# Altium PCB ESL.PcbDoc
Units mm, origin at the board's own origin, x right, y up, seen from the top; angles counter-clockwise.
Board outline 59.36 x 30.02 mm, 2 copper layers (Top Layer, Bottom Layer), stack 1.571 mm thick; 26 components, 27 nets, 138 pads, 86 vias.
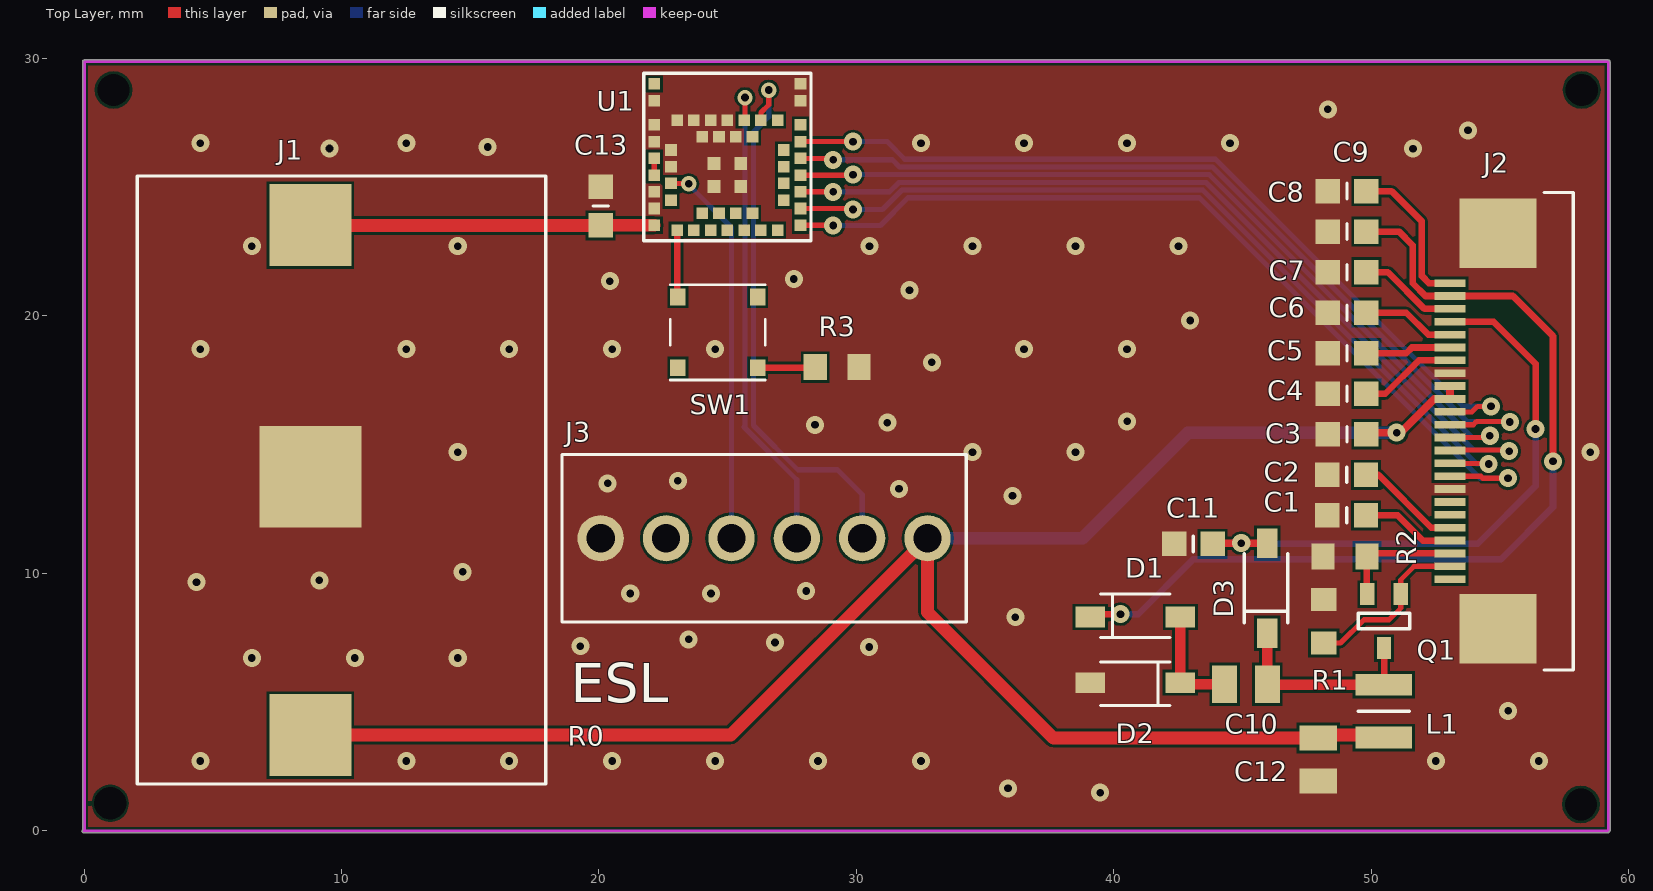
[diagram p0: Top Layer view]
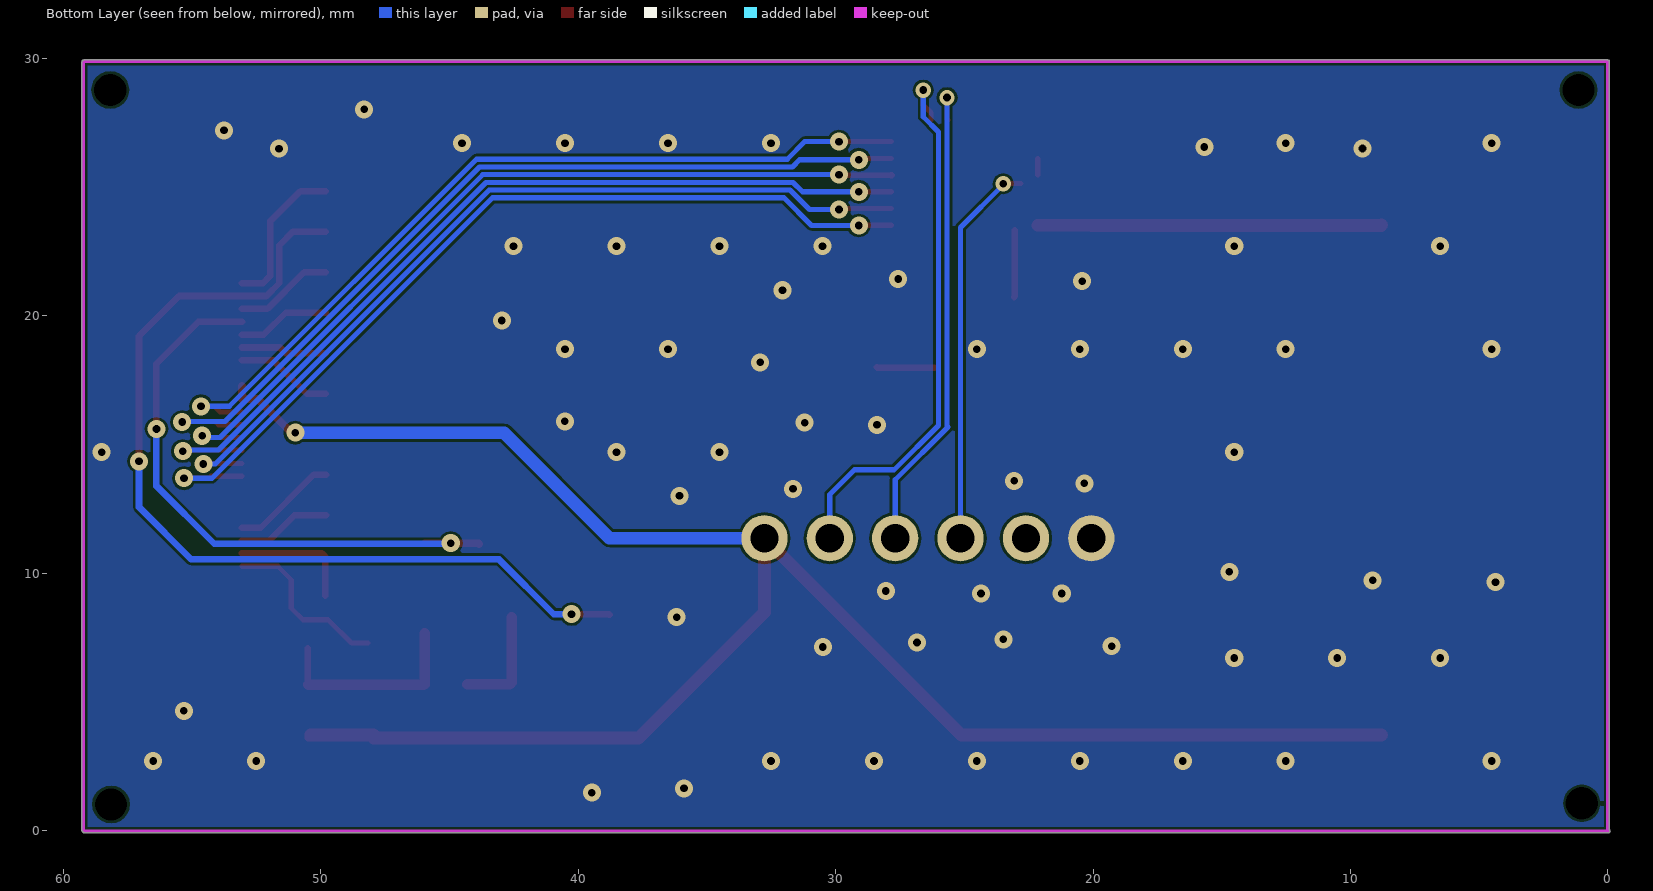
[diagram p1: Bottom Layer view, seen from below]
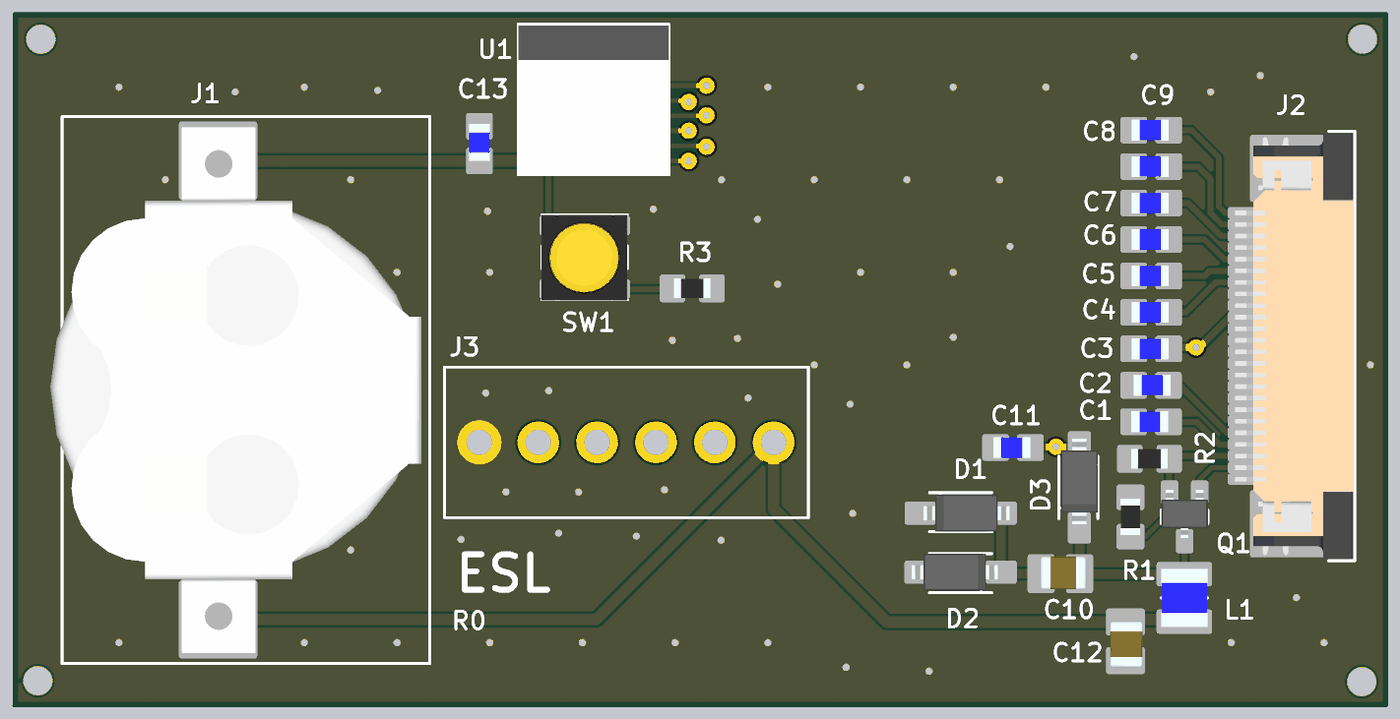
[diagram p2: 3D render of the assembled board from above, using the file's embedded part models]

## Layer stack, top to bottom
Top Solder: solder mask 0.0102, Solder Resist, Dk 3.5
Top Layer: signal copper 0.0356
Dielectric 1: dielectric 1.5, FR-4, Dk 4.8
Bottom Layer: signal copper 0.0356
Bottom Solder: solder mask 0.0102, Solder Resist, Dk 3.5

## Board outline
-0.022,-0.088 cw(c-0.022,-0.025) -0.063,0.023 -0.063,29.87 cw(c0,29.87) 0,29.933 59.214,29.933 cw(c59.214,29.87) 59.277,29.87 59.277,0 cw(c59.214,0) 59.244,-0.055 cw(c59.189,-0.025) 59.189,-0.088

## Design rules (kind name [scope] priority, off if disabled: settings)
BoardOutlineClearance [All] p1: gap=0.1 ignorepadtopadclearanceinfootprint=FALSE except(0.25: Arc-OutlineEdge Arc-CutoutEdge)
Clearance [All] p1: gap=0.1 ignorepadtopadclearanceinfootprint=TRUE
HoleSize [All] p1: absolutevalues=TRUE maxlimit=5 minlimit=0.025 maxpercent=80.000 minpercent=20.000
MinimumAnnularRing [All] p1: minimumring=0.125
MinimumSolderMaskSliver [All] p1: minsoldermaskwidth=0.1
PasteMaskExpansion [All] p1: expansion=0.1
PlaneConnect [All] p1: planeconnectstyle=Direct reliefexpansion=0.508 reliefentries=4 reliefconductorwidth=0.254 reliefairgap=0.254
PolygonConnect [All] p1: connectstyle=Direct reliefconductorwidth=0.254 reliefentries=4 polygonreliefangle="90 Angle" airgapwidth=0.254
RoutingVias [All] p1: holewidth=0.3 width=0.7 viastyle="Through Hole" minholewidth=0.3 minwidth=0.6 maxholewidth=0.3 maxwidth=0.7
SilkToSilkClearance [All] p1: silktosilkclearance=0.1
SilkToSolderMaskClearance [IsPad] p1: minsilkscreentomaskgap=0.1 clearancetoexposedcopper=TRUE
SolderMaskExpansion [All] p1: expansion=0.1 istentingtop=FALSE soldermaskfromhole=TRUE
Width [All] p1: maxlimit=0.5 minlimit=0.2 preferedwidth=0.2
24 further rules are at their usual default settings.

## Components (designator, comment, footprint, x,y, rotation, side; value= is the part's Value field where it differs from the comment)
C1 "Capacitor" CAPC1608N 49.047,12.243 r0 top
C2 "Capacitor" CAPC1608N 49.047,13.818 r180 top
C3 "Capacitor" CAPC1608N 49.059,15.392 r0 top
C4 "Capacitor" CAPC1608N 49.059,16.967 r0 top
C5 "Capacitor" CAPC1608N 49.059,18.542 r0 top
C6 "Capacitor" CAPC1608N 49.059,20.117 r0 top
C7 "Capacitor" CAPC1608N 49.059,21.692 r0 top
C8 "Capacitor" CAPC1608N 49.059,23.266 r0 top
C9 "Capacitor" CAPC1608N 49.059,24.841 r0 top
C10 "Capacitor" CAPC2012N 45.136,5.682 r180 top
C11 "Capacitor" CAPC1608N 43.091,11.132 r0 top
C12 "Capacitor" CAPC2012N 47.945,2.761 r90 top
C13 "Capacitor" CAPC1608N 20.066,24.257 r270 top
D1 "MBR0530T1G" DO-SOD-123 40.837,8.295 r0 top
D2 "MBR0530T1G" DO-SOD-123 40.831,5.747 r180 top
D3 "MBR0530T1G" DO-SOD-123 45.957,9.41 r90 top
J1 "Battery_Holder" Battery_Holder 8.788,13.614 r90 top
J2 "WR-FPC" WR-FPC-68712414022 53.061,9.764 r90 top locked
J3 "282834-6" 282834-6 26.415,11.354 r180 top
L1 "1239AS-H-100M=P2" IND_2520 50.488,3.611 r90 top
Q1 "SI1308EDL-T1-GE3" MOS-SOT-323-3 51.148,9.187 r270 top
R1 "Resistor" RESC1608N 48.161,8.129 r270 top
R2 "Resistor" RESC1608N 48.983,10.643 r0 top
R3 "Resistor" RESC1608N 29.253,18.004 r180 top
SW1 "TL3312NF160Q" SPST-TL3312NF160Q 23.062,20.726 r0 top
U1 "ANNA-B112-01B" ANNA-B112-01B 22.148,29.004 r0 top

## Footprints (in the part's own frame and the unit in brackets; to place one, negate y for a bottom-side part, rotate by r counter-clockwise, add the part's x,y. Pads: shape width x height; smd on the part's side, far side on the other; paste and mask are expansions set on the pad)
282834-6 [mm]
  round 1.8 hole 1.1 mask+0.05: 1(-6.35,0) 2(-3.81,0) 3(-1.27,0) 4(1.27,0) 5(3.81,0) 6(6.35,0)
  silkscreen extent -7.85,-3.25 7.85,3.25
ANNA-B112-01B [mm]
  rect 0.45x0.45 smd: 1(0,0) 2(0,-0.65) 3(0,-1.592) 4(0,-2.242) 5(0,-2.892) 6(0,-3.542) 7(0,-4.192) 8(0,-4.842) 9(0,-5.492) 10(0.65,-2.567) 11(0.65,-3.217) 12(0.65,-3.867) 13(0.65,-4.517) 14(0.89,-5.68) 15(1.54,-5.68) 16(2.19,-5.68) 17(2.84,-5.68) 18(3.49,-5.68) 19(4.14,-5.68) 20(4.79,-5.68) 21(1.865,-5.03) 22(2.515,-5.03) 23(3.165,-5.03) 24(3.815,-5.03) 25(5.68,-5.492) 26(5.68,-4.842) 27(5.68,-4.192) 28(5.68,-3.542) 29(5.68,-2.892) 30(5.68,-2.242) 31(5.68,-1.592) 32(5.68,-0.65) 33(5.68,0) 34(5.03,-4.517) 35(5.03,-3.867) 36(5.03,-3.217) 37(5.03,-2.567) 38(4.79,-1.405) 39(4.14,-1.405) 40(3.49,-1.405) 41(2.84,-1.405) 42(2.19,-1.405) 43(1.54,-1.405) 44(0.89,-1.405) 45(3.815,-2.055) 46(3.165,-2.055) 47(2.515,-2.055) 48(1.865,-2.055)
  rect 0.5x0.5 smd: 49(2.32,-3.092) 50(2.32,-3.992) 51(3.36,-3.092) 52(3.36,-3.992)
  silkscreen extent -0.41,-6.09 6.09,0.41, body extent -0.41,-6.14 6.09,0.36, height 1.25
Battery_Holder [mm]
  rect 3.18x3.18 smd: +(-9.906,0) +(9.906,0)
  rect 3.96x3.96 smd: -(0.127,0)
  silkscreen extent -11.81,-9.14 11.81,6.73, body extent -11.35,-8.76 11.35,7.24, height 3.95
CAPC1608N [mm]
  rrect0% 0.95x0.95 smd: 1(-0.75,0) 2(0.75,0)
  silkscreen extent 0,-0.3 0,0.3, body extent -0.85,-0.45 0.75,0.45, height 0.81
CAPC2012N [mm]
  rect 0.97x1.47 smd: 1(-0.83,0) 2(0.83,0)
  body extent -1.13,-0.76 0.87,0.69, height 1.18
DO-SOD-123 [mm]
  rect 1.15x0.8 smd: 1(-1.75,0) 2(1.75,0)
  silkscreen extent -1.35,-0.8 1.35,0.89, body extent -1.6,-0.8 2.11,0.8, height 1.35
IND_2520 [mm]
  rect 0.85x2.2 smd: 1(0,0) 2(2.05,0)
  silkscreen extent 1.02,-1 1.02,1, body extent -0.22,-1 2.28,1, height 1.2
MOS-SOT-323-3 [mm]
  rect 0.85x0.55 smd: 1(0,0) 2(0,-1.3) 3(2.1,-0.65)
  silkscreen extent 0.75,-1.65 1.35,0.35, body extent -0.13,-1.65 1.97,0.35, height 1.1
RESC1608N [mm] "Chip Resistor, Body 1.6x0.8mm, IPC Medium Density"
  rect 0.9x1 smd: 1(-0.85,0) 2(0.85,0)
  body extent -0.79,-0.42 0.79,0.43, height 0.5
SPST-TL3312NF160Q [mm]
  rect 0.6x0.65 smd: 1(0,0) 2(3.1,0) 3(0,-2.75) 4(3.1,-2.75)
  silkscreen extent -0.3,-3.22 3.4,0.47, body extent -0.33,-3.25 3.37,0.45, height 0.81
WR-FPC-68712414022 [mm] "ZIF Connectors, Horizontal, Top Contact, pitch 0.5mm, 24p"
  rect 0.3x1.2 smd: 1(0,0) 2(0.5,0) 3(1,0) 4(1.5,0) 5(2,0) 6(2.5,0) 7(3,0) 8(3.5,0) 9(4,0) 10(4.5,0) 11(5,0) 12(5.5,0) 13(6,0) 14(6.5,0) 15(7,0) 16(7.5,0) 17(8,0) 18(8.5,0) 19(9,0) 20(9.5,0) 21(10,0) 22(10.5,0) 23(11,0) 24(11.5,0)
  rect 2.7x3 smd: MP1(-1.93,-1.86) MP2(13.43,-1.86)
  silkscreen extent -3.53,-4.78 15.02,-3.66, body extent -3.45,-4.71 14.95,0.39, height 2.1

## Part data
C1 C2 C3 C4 C5 C6 C7 C8 C9 C11 C13: library part CAP-000000001, Value 1=1uF, Value 2=50V, DES="Multilayer Ceramic Capacitors MLCC - SMD/SMT 1uF 50V X5R +/-10% 0603 Gen Purp", FTP=0603, MAN="Taiyo Yuden", MANREF=UMK107BJ105KA-T, NOTE=_, Part Number=CAP-000000001, SUP=Mouser, SUPREF=963-UMK107BJ105KA-T, TOL=10%
C10 C12: library part CAP-000000002, Value 1=4.7uF, Value 2=50V, DES="Multilayer Ceramic Capacitors MLCC - SMD/SMT", FTP=0805, MAN="Murata Electronics", MANREF=GRM21BZ71H475KE15K, NOTE=_, Part Number=CAP-000000002, SUP=Mouser, SUPREF=81-GRM21BZ71H475KE5K, TOL=10%
D1 D2 D3: library part DIR-000000001, "Diode", Value 1="500 mA", Value 2="30 V", DES="Schottky Diodes & Rectifiers 0.5A 30V", FTP=SOD-123, MAN="ON Semiconductor", MANREF=MBR0530T1G, NOTE=_, Part Number=DIR-000000001, SUP=Mouser, SUPREF=863-MBR0530T1G, TOL=_
J1: library part CON-000000002, Value 1=_, Value 2="16 mm", DES="Coin Cell Battery Holders 3012 matte Tin Coin Coin Cell Retainer", FTP=SMD/SMT, MAN="Keystone Electronics", MANREF=3092, NOTE=_, Part Number=CON-000000002, SUP=Mouser, SUPREF=534-3092, TOL=_
J2: library part CON-000000001, Value 1=24pts, Value 2=_, ComponentLink1Description=Manufacturer, ComponentLink1URL=http://www.we-online.de, ComponentLink2Description=Datasheet, ComponentLink2URL=https://katalog.we-online.com/em/datasheet/68712414022.pdf, DES="FFC & FPC Connectors WR-FPC 0.5mm SMT ZIF 24Pin Hrztl Top Cont", FTP=SMD/SMT, MAN="Wurth Elektronik", MANREF=68712414022, NOTE=_, Part Number=CON-000000001, SUP=Mouser, SUPREF=710-68712414022, TOL=_
J3: library part CON-000000003, "Header, 6-Pin", Value 1=6pts, Value 2=2.54mm, DES="282834-6 -  Bornier fil-à-carte, 2.54 mm, 6 Voies, 30 AWG, 16 AWG, 1.4 mm², Par vis", FTP=THT, MAN="BUCHANAN - TE CONNECTIVITY", MANREF=282834-6, NOTE=_, Part Number=CON-000000003, SUP=Farnell, SUPREF=2396255, TOL=_
L1: library part IND-000000001, "Inductor", Value 1="10 uH", Value 2="1 A", DES="Fixed Inductors 10.0uH 460mOhms1.0A +/-20% 2.5x2.0x1.2mm", FTP=2520, MAN="Murata Electronics", MANREF=1239AS-H-100M=P2, NOTE=_, Part Number=IND-000000001, SUP=Mouser, SUPREF=81-1239AS-H-100MP2, TOL="20 %"
Q1: library part TRM-000000001, Value 1="1.5 A", Value 2="30 V", DES="MOSFET 30V Vds 12V Vgs SC70-3", FTP=SOT-323-3, MAN="Vishay Semiconductors", MANREF=SI1308EDL-T1-GE3, NOTE=_, Part Number=TRM-000000001, SUP=Mouser, SUPREF=78-SI1308EDL-T1-GE3, TOL=_
R1 R3: library part RES-000000002, Value 1=10K, Value 2=0.1W, DES="YAGEO (PHYCOMP)  RC0603FR-0710KL  RESISTANCE COUCHE EPAISSE 10K 0.1W 1%", FTP=0603, MAN=YAGEO, MANREF=RC0603FR-0710KL, NOTE=_, Part Number=RES-000000002, SUP=Farnell, SUPREF=9238603, TOL=1%
R2: library part RES-000000001, Value 1=0.47R, Value 2=0.1W, DES="CRL0603-FW-R470ELF -  Résistance à puce CMS, Couche épaisse, 0603 [1608 Metric], 0.47 ohm, Série CRL, Couche épaisse", FTP=0603, MAN=BOURNS, MANREF=CRL0603-FW-R470ELF, NOTE=_, Part Number=RES-000000001, SUP=Farnell, SUPREF=2328098, TOL=1%
SW1: library part SWC-000000001, Value 1=_, DES="Tactile Switches 50mA 12VDC .25mm H 160gf SPST 3.7x3.7mm", FTP=_, MAN=E-Switch, MANREF=TL3312NF160Q, NOTE=_, Part Number=SWC-000000001, SUP=Mouser, SUPREF=612-TL3312NF160Q, TOL=_, Value 2=_
U1: library part RFC-000000001, Package="SMD-52 U-Blox America", Value 1=_, Availability=Unavailable, DES="Bluetooth Bluetooth v5.0 Transceiver Module 2.4GHz Integrated, Chip Surface Mount", FTP=_, MAN=U-Blox, MANREF=ANNA-B112-01B, MF="U-Blox America", MP=ANNA-B112, NOTE=_, Part Number=RFC-000000001, Price=None, SnapEDA_Link=https://www.snapeda.com/parts/ANNA-B112/U-Blox%20America%20Inc./view-part/3115089/?ref=snap, SUP=Digi-Key, SUPREF=672-ANNA-B112-01BTR-ND, TOL=_, Value 2=_

## Free pads (board coordinates)
  round 0 hole 1.25: MT(1.011,1.056) MT(1.139,28.768) MT(58.145,1.016) MT(58.178,28.772)

## Via types
v1: diameter 0.7, hole 0.3, Top Layer to Bottom Layer, tented both sides, 66 vias
v2: diameter 0.7, hole 0.3, Top Layer to Bottom Layer, 17 vias
v3: diameter 0.6, hole 0.3, Top Layer to Bottom Layer, 3 vias

## Nets (pads, with @x,y where several pads share a name; then routed paths per layer and width w, separated by ;. In a path a pad name is that pad's centre, name@x,y a point inside that pad or via, vN(x,y) a via of type N, cw(c..) or ccw(c..) an arc to the next point about the centre after c; other vN are vias at no path point)
3V: C3.2 C12.2 C13.2 J1.+ J2.15 J2.16 J3.1 L1.1 U1.9 | length 87.4
  Top Layer w0.3: C3.2 49.87,15.453 v2(50.989,15.453) 51.137,15.453 52.448,16.764 J2.15 J2.16 ; L1.1@50.391,3.708 L1.1
  Top Layer w0.5: J1.+@8.788,3.708 25.12,3.708 J3.1 32.765,8.477 37.651,3.591 C12.2 ; J1.+@8.788,23.52 8.802,23.507 C13.2 20.071,23.512 U1.9 ; C12.2@47.945,3.708 L1.1@50.391,3.708
  Bottom Layer w0.5: J3.1 38.783,11.354 42.882,15.453 v2(50.989,15.453)
BUSY: J2.9 U1.25 | length 34.8
  Top Layer w0.2: U1.25 v2@29.041,23.512 ; J2.9 54.254,13.764 54.334,13.685 v2(55.314,13.685) v2@55.36,13.731
  Top Layer w0.254: v2@29.041,23.512 29.044,23.512 v2@29.049,23.507
  Bottom Layer w0.2: v2(29.1,23.507) 30.933,23.507 32.005,24.579 43.333,24.579 54.227,13.685 v2(55.314,13.685) v2@55.36,13.731
CS: J2.12 U1.28 | length 35.9
  Top Layer w0.2: J2.12 54.254,15.264 ; U1.28@27.836,25.455 v2@29.87,25.455 ; U1.28@27.836,25.455 v2@29.87,25.455 ; U1.28@27.836,25.455 v2@29.87,25.455
  Top Layer w0.254: U1.28 U1.28@27.836,25.455
  Bottom Layer w0.2: v2(29.869,25.479) 43.706,25.479 53.921,15.264 54.254,15.264
  other v2: 54.607,15.336
D/C: J2.11 U1.27 | length 34.3
  Top Layer w0.2: U1.27 v2@29.054,24.812 ; J2.11 53.081,14.785 55.314,14.785 v2(55.36,14.738)
  Bottom Layer w0.2: v2(29.1,24.813) 31.284,24.813 31.65,25.179 43.582,25.179 53.976,14.785 54.334,14.785 ; 54.335,14.785 55.314,14.785 v2(55.36,14.738)
GDR: J2.2 Q1.1 R1.2 | length 6.8
  Top Layer w0.2: R1.2 48.811,7.279 49.717,8.185 50.695,8.185 51.148,8.638 Q1.1 51.148,9.738 51.674,10.264 J2.2
GND: C1.1 C2.2 C3.1 C4.1 C5.1 C6.1 C7.1 C8.1 C9.1 C11.1 C12.1 C13.1 D2.2 J1.- J2.8 J2.17 J2.MP1 J2.MP2 J3.6 R1.1 R2.1 R3.1 U1.2 U1.3 U1.4 U1.7 U1.8 U1.10 U1.11 U1.32 U1.33 U1.41 U1.42 U1.43 U1.44 U1.46 U1.47 U1.48 U1.49 U1.50 U1.51 U1.52
  other v1: 39.471,1.468 35.892,1.639 4.512,2.7 12.512,2.7 16.512,2.7 20.512,2.7 24.512,2.7 28.512,2.7 32.512,2.7 52.512,2.7 56.512,2.7 55.321,4.65 6.512,6.7 10.512,6.7 14.512,6.7 30.496,7.127 19.275,7.159 26.84,7.301 23.485,7.428 36.176,8.285 21.214,9.208 24.35,9.208 28.046,9.305 4.362,9.649 9.133,9.72 14.702,10.051 36.062,13.001 31.658,13.274 20.339,13.487 23.062,13.584 14.512,14.7 34.512,14.7 38.512,14.7 58.512,14.7 28.392,15.758 31.201,15.844 40.52,15.895 32.932,18.187 4.512,18.7 12.512,18.7 16.512,18.7 20.512,18.7 24.512,18.7 36.512,18.7 40.512,18.7 42.965,19.816 32.066,20.988 20.422,21.342 27.568,21.425 6.512,22.7 14.512,22.7 30.512,22.7 34.512,22.7 38.512,22.7 42.512,22.7 9.527,26.491 51.623,26.488 15.674,26.556 4.512,26.7 12.512,26.7 32.512,26.7 36.512,26.7 40.512,26.7 44.512,26.7 53.762,27.201 48.313,28.016
GPIO_14: SW1.1 SW1.3 U1.14 | length 2.6
  Top Layer w0.254: U1.14 23.038,20.75 SW1.1
NetC1_2: C1.2 J2.4 | length 3.7
  Top Layer w0.254: C1.2 51.021,12.243 52,11.264 J2.4
NetC2_1: C2.1 J2.5 | length 4.1
  Top Layer w0.254: C2.1 50.281,13.818 52.335,11.764 J2.5@53.061,11.764
NetC4_2: C4.2 J2.18 | length 3.8
  Top Layer w0.254: C4.2 50.546,16.967 51.843,18.264 J2.18
NetC5_2: C5.2 J2.19 | length 3.3
  Top Layer w0.254: C5.2 51.359,18.542 51.581,18.764 J2.19
NetC6_2: C6.2 J2.20 | length 3.6
  Top Layer w0.254: C6.2 51.359,20.117 52.212,19.264 J2.20
NetC7_2: C7.2 J2.22 | length 3.8
  Top Layer w0.254: C7.2 50.648,21.692 52.075,20.264 J2.22
NetC10_1: C10.1 D3.1 L1.2 Q1.3 | length 7.9
  Top Layer w0.254: L1.2 50.498,5.671 Q1.3
  Top Layer w0.4: D3.1 45.966,7.651 C10.1 45.987,5.661 L1.2
NetC10_2: C10.2 D1.2 D2.1 | length 4.3
  Top Layer w0.4: D1.2 42.581,8.289 D2.1 42.646,5.682 C10.2
NetR3_2: R3.2 SW1.2 SW1.4 | length 2.3
  Top Layer w0.254: SW1.4 28.375,17.976 R3.2
NetU1_5: U1.5 U1.6 | length 0.7
  Top Layer w0.2: U1.6 U1.5
PREVGH: C11.2 D3.2 J2.21 | length 45.8
  Top Layer w0.254: J2.21 54.754,19.764 56.384,18.134 v2(56.384,15.601)
  Top Layer w0.3: C11.2 C11.2@43.869,11.16 ; C11.2@43.869,11.16 D3.2 ; C11.2@43.869,11.16 D3.2 ; C11.2@43.869,11.16 D3.2
  Bottom Layer w0.254: v2(44.951,11.163) v2@44.951,11.14 ; v2(56.384,15.601) 56.384,13.383 54.141,11.14 ; v2@44.951,11.14 54.141,11.14 ; v2@44.951,11.14 54.141,11.14 ; v2@44.951,11.14 54.141,11.14
PREVGL: C8.2 D1.1 J2.23 | length 39.3
  Top Layer w0.254: D1.1@38.784,8.377 D1.1@38.812,8.405 ; C8.2 51.079,23.266 51.614,22.731 51.614,21.258 52.109,20.764 J2.23 55.505,20.764 57.062,19.207 v2(57.062,14.341) ; D1.1@38.812,8.405 v2(40.257,8.405) ; D1.1@38.812,8.405 v2(40.257,8.405) ; D1.1@38.812,8.405 v2(40.257,8.405)
  Bottom Layer w0.254: v2(40.257,8.405) 40.946,8.405 43.073,10.532 55.028,10.532 57.062,12.565 v2(57.062,14.341)
RES: J2.10 U1.26 | length 38.8
  Top Layer w0.2: v2@29.869,24.162 U1.26 ; J2.10 v2@54.254,14.264 ; U1.26 v2@29.884,24.162 ; U1.26 v2@29.884,24.162 ; U1.26 v2@29.884,24.162
  Bottom Layer w0.2: v2(29.869,24.122) 31.017,24.122 31.774,24.879 43.457,24.879 54.102,14.235 v2(54.562,14.235)
RESE: J2.3 Q1.2 R2.2 | length 10.9
  Top Layer w0.254: J2.3 49.955,10.764 R2.2 ; Q1.2@49.833,9.119 Q1.2@49.833,9.187 ; Q1.2@49.833,9.119 R2.2 ; Q1.2@49.833,9.119 R2.2 ; Q1.2@49.833,9.119 R2.2 ; Q1.2@49.833,9.119 Q1.2@49.833,9.187 ; Q1.2@49.833,9.187 R2.2 ; Q1.2@49.833,9.187 R2.2
RESET_N: J3.4 U1.12 | length 15.2
  Top Layer w0.2: U1.12 23.475,25.137 v3(23.488,25.124)
  Bottom Layer w0.2: v3(23.488,25.124) 23.488,25.086 25.145,23.429 J3.4
SCLK: J2.13 U1.29 | length 34.2
  Top Layer w0.2: U1.29 v2@29.045,26.112 ; J2.13 53.967,15.764 54.089,15.886 55.37,15.886 v2(55.387,15.869)
  Top Layer w0.254: v2@29.045,26.112 v2(29.1,26.057)
  Bottom Layer w0.2: v2(29.1,26.057) 31.4,26.057 31.678,25.779 43.83,25.779 53.723,15.886 55.37,15.886 v2(55.387,15.869)
SDI: J2.14 U1.30 | length 32.8
  Top Layer w0.2: U1.30 v2(29.869,26.762) ; J2.14 53.917,16.264 54.131,16.478 54.651,16.478 v2(54.654,16.481)
  Bottom Layer w0.2: v2(29.869,26.762) 31.198,26.762 31.881,26.079 43.954,26.079 53.552,16.481 v2(54.654,16.481)
SWDCLK: J3.2 U1.39 | length 21.6
  Top Layer w0.2: U1.39 26.288,27.892 26.593,28.197 v3(26.593,28.765)
  Bottom Layer w0.2: v3(26.593,28.765) 26.593,27.729 26.004,27.14 26.004,15.734 27.725,14.013 29.267,14.013 30.225,13.055 J3.2
SWDIO: J3.3 U1.40 | length 19
  Top Layer w0.2: v3(25.672,28.474) U1.40@25.672,27.634 ; U1.40 U1.40@25.672,27.634 ; U1.40 U1.40@25.672,27.634 ; U1.40 U1.40@25.672,27.634
  Bottom Layer w0.2: v3(25.672,28.474) 25.672,15.709 25.638,15.675 27.685,13.628 J3.3
VCOM: C9.2 J2.24 | length 6
  Top Layer w0.254: C9.2 50.787,24.841 51.968,23.66 51.968,21.539 52.244,21.264 J2.24
pads on no net: J2.1 J2.6 J2.7 J3.5 U1.1 U1.13 U1.15 U1.16 U1.17 U1.18 U1.19 U1.20 U1.21 U1.22 U1.23 U1.24 U1.31 U1.34 U1.35 U1.36 U1.37 U1.38 U1.45

## Polygon pours and split planes (outlines as drawn)
GND on Top Layer "GND_L01_P014" (solid, remove dead copper, pour order 14): -0.022,-0.088 cw(c-0.022,-0.025) -0.063,0.023 -0.063,29.87 cw(c0,29.87) 0,29.933 59.214,29.933 cw(c59.214,29.87) 59.277,29.87 59.277,0 cw(c59.214,0) 59.244,-0.055 cw(c59.189,-0.025) 59.189,-0.088
GND on Bottom Layer "GND_L02_P012" (solid, remove dead copper, pour order 12): -0.022,-0.088 cw(c-0.022,-0.025) -0.063,0.023 -0.063,29.87 cw(c0,29.87) 0,29.933 59.214,29.933 cw(c59.214,29.87) 59.277,29.87 59.277,0 cw(c59.214,0) 59.244,-0.055 cw(c59.189,-0.025) 59.189,-0.088

## Keep-outs
Keep-Out Layer:
  lines w0.125: -0.022,-0.025 59.189,-0.025 ; 0,0 0,29.87 59.214,29.87 59.214,0

## Silkscreen, mask and mechanical layers (free items; w line width, h text height)
Top Overlay:
  text "ESL" at 18.902,4.977 h1.52
  text "R0" at 18.793,3.291 h0.76